# Altium PCB Mobo.PcbDoc (part 2 of 3)
Units mm, origin at the board's own origin, x right, y up, seen from the top; angles counter-clockwise.
Board outline 192.03 x 94.33 mm, 5 copper layers (Top Layer, POWER, InternalPlane2, GND, Bottom Layer); 327 components, 282 nets, 956 pads, 380 vias.
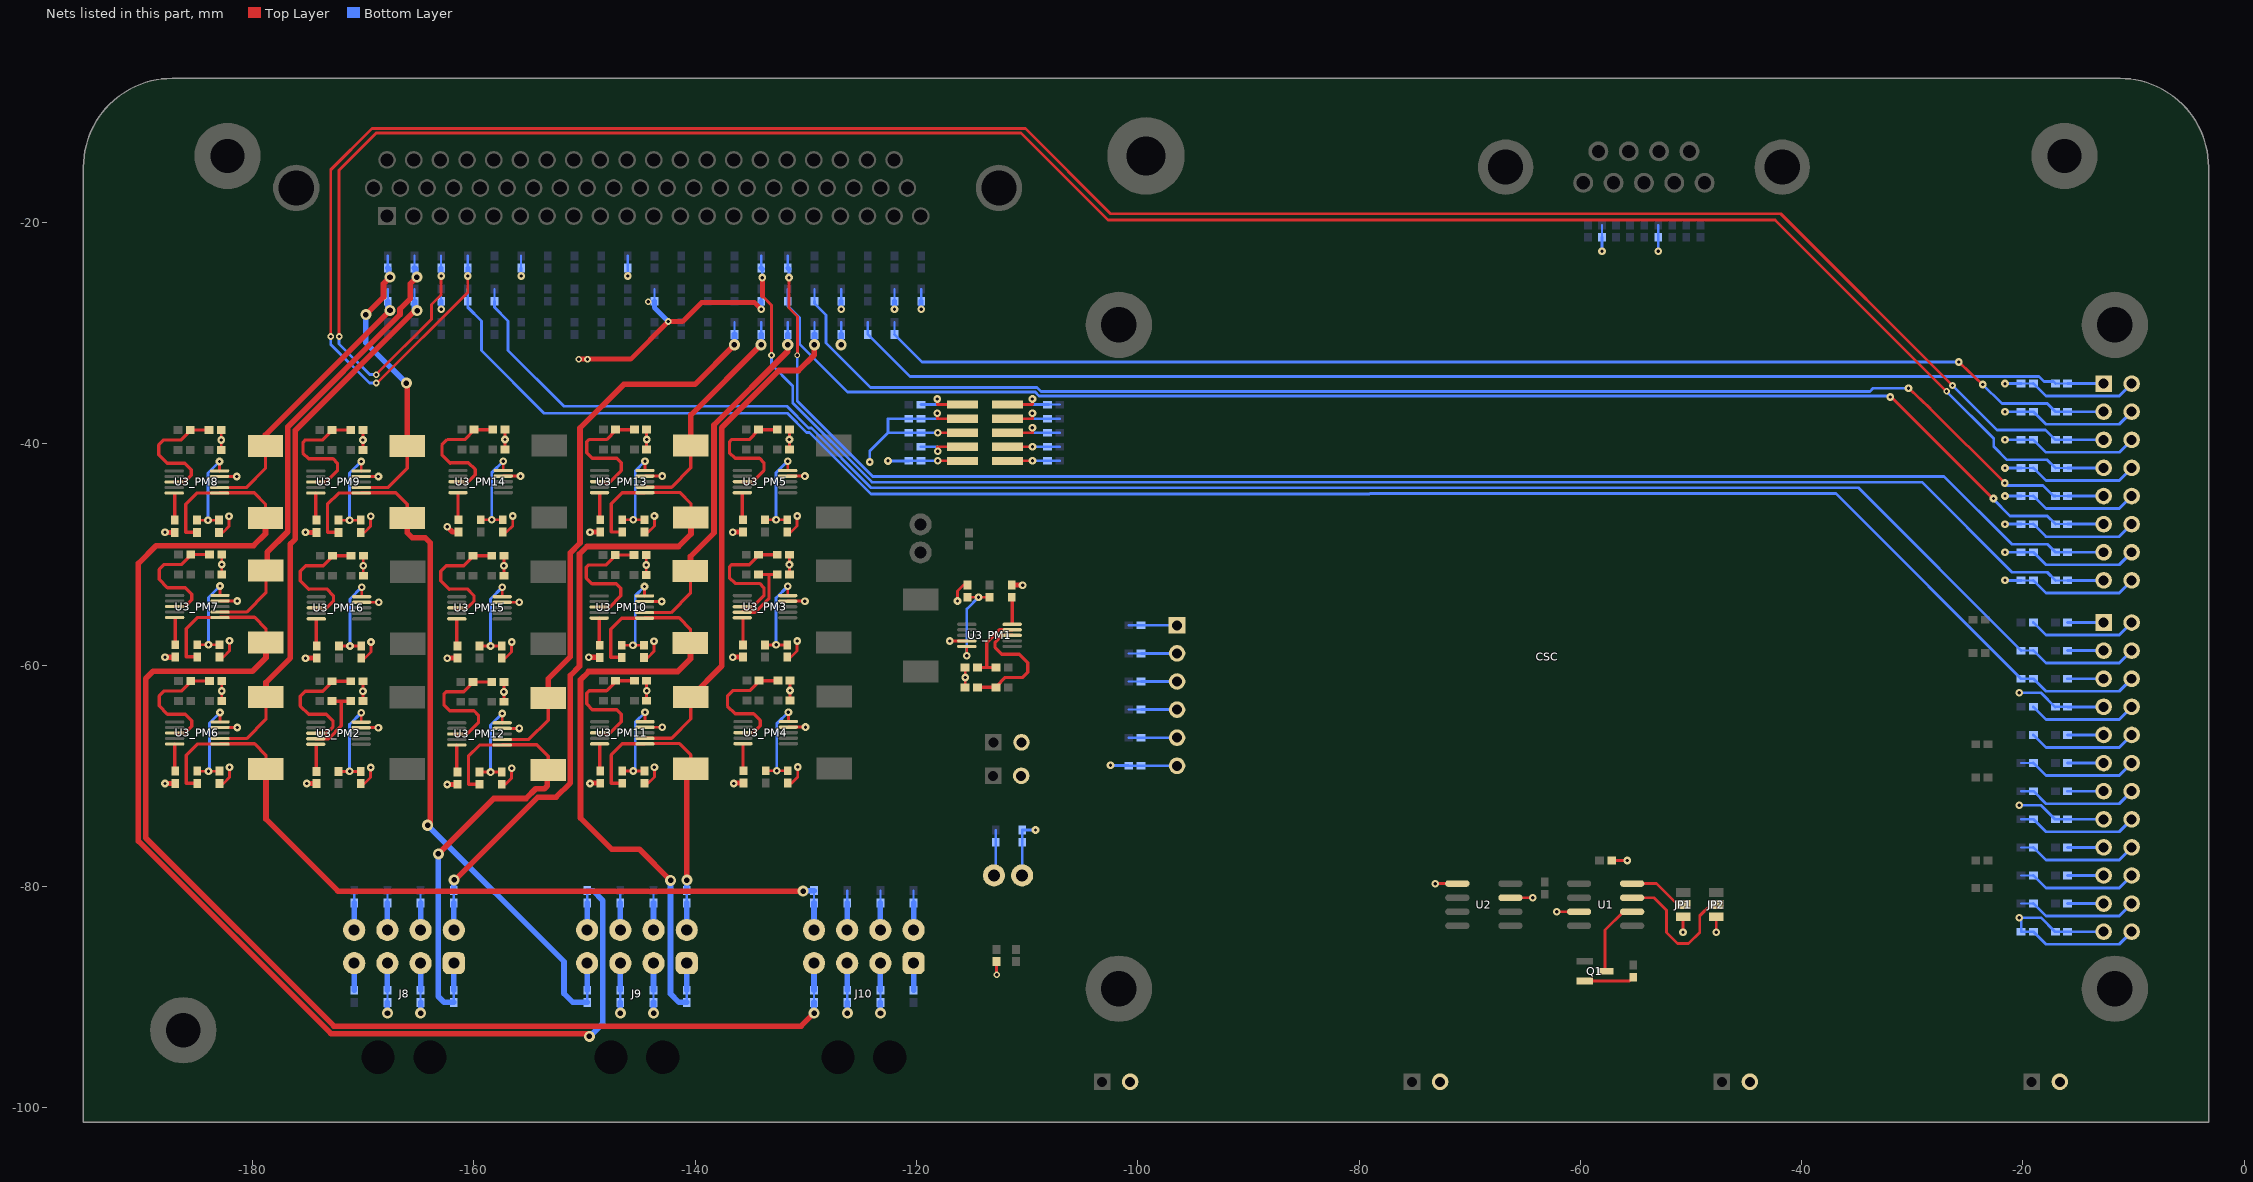
[diagram p5: the nets of this part, all layers, seen from the top]

## Via types
v1: diameter 0.7, hole 0.3, Top Layer to Bottom Layer, tented both sides, 256 vias
v2: diameter 1, hole 0.5, Top Layer to Bottom Layer, tented both sides, 61 vias
v3: diameter 0.6, hole 0.3, Top Layer to Bottom Layer, tented both sides, 37 vias
v4: diameter 0.6, hole 0.3, Top Layer to Bottom Layer, tented bottom, 20 vias
v5: diameter 0.7, hole 0.3, Top Layer to Bottom Layer, tented top, 5 vias
v6: diameter 0.5, hole 0.3, Top Layer to Bottom Layer, tented both sides, 1 vias

## Nets (pads, with @x,y where several pads share a name; then routed paths per layer and width w, separated by ;. In a path a pad name is that pad's centre, name@x,y a point inside that pad or via, vN(x,y) a via of type N, cw(c..) or ccw(c..) an arc to the next point about the centre after c; other vN are vias at no path point) (continued)
9V1_RX1: R13_PM6.1 U3_PM6.2 Z69.2 | length 48.5
  Top Layer w0.3: U3_PM6.2@-182.925,-66.644 -180.525,-66.644 -178.775,-64.894 R13_PM6.1@-178.775,-62.894
  Top Layer w0.508: R13_PM6.1@-178.775,-62.894 -178.775,-61.57 -176.566,-59.361 -176.566,-49.062 -176.116,-48.612 -176.116,-38.791 -165.298,-27.973 v2(-165.124,-27.973)
  Bottom Layer w0.508: Z69.2@-165.355,-27.125 -165.355,-27.7 -165.124,-27.931 v2(-165.124,-27.973)
9V1_RX1_IN: R10_PM6.1 R13_PM6.2 U3_PM6.1 Z95.1 | length 69.6
  Top Layer w0.3: R10_PM6.1@-184.975,-70.694 -185.975,-70.694 -185.975,-68.144 -184.975,-67.144 U3_PM6.1@-182.925,-67.144 ; U3_PM6.1@-182.925,-67.115 -179.804,-67.115 -178.775,-68.144 R13_PM6.2@-178.775,-69.394
  Top Layer w0.508: R13_PM6.2@-178.775,-69.394 -178.775,-73.927 -172.266,-80.436 v2(-130.241,-80.436)
  Bottom Layer w0.508: v2(-130.241,-80.436) -130.196,-80.391 Z95.1@-129.25,-80.391
9V1_RX2: R13_PM7.1 U3_PM7.2 Z68.2 | length 39.9
  Top Layer w0.3: U3_PM7.2@-182.925,-55.214 -180.525,-55.214 -178.775,-53.464 R13_PM7.1@-178.775,-51.711
  Top Layer w0.508: R13_PM7.1@-178.775,-51.711 -178.666,-51.602 -178.666,-49.811 -176.81,-47.955 -176.81,-38.48 -166.66,-28.331 -166.66,-27.83 -165.747,-26.917 -165.747,-25.56 v2(-165.142,-24.955)
  Bottom Layer w0.508: Z68.2@-165.355,-24.125 -165.264,-24.217 -165.264,-24.833 v2(-165.142,-24.955)
9V1_RX2_IN: R10_PM7.1 R13_PM7.2 U3_PM7.1 Z94.1 | length 109.2
  Top Layer w0.3: R10_PM7.1@-184.975,-59.264 -185.975,-59.264 -185.975,-56.714 -184.975,-55.714 U3_PM7.1@-182.925,-55.714 ; U3_PM7.1@-182.925,-55.685 -179.804,-55.685 -178.775,-56.714 R13_PM7.2@-178.775,-57.964
  Top Layer w0.508: R13_PM7.2@-178.775,-57.964 -178.775,-59.345 -179.991,-60.561 -188.966,-60.561 -189.641,-61.236 -189.641,-75.636 -172.641,-92.636 -130.416,-92.636 v2(-129.241,-91.461)
  Bottom Layer w0.508: Z94.1@-129.25,-90.491 -129.25,-91.452 v2(-129.241,-91.461)
9V1_TX1: R13_PM10.1 U3_PM10.2 Z5.1 | length 32.8
  Top Layer w0.3: U3_PM10.2@-144.566,-55.261 -142.166,-55.261 -140.416,-53.511 R13_PM10.1@-140.416,-51.511
  Top Layer w0.508: R13_PM10.1@-140.416,-51.511 -140.416,-50.186 -138.291,-48.061 -138.291,-38.311 -131.626,-31.646 v2(-131.626,-31.061)
  Bottom Layer w0.508: v2@-131.615,-31.05 v2(-131.626,-31.061) v2@-131.615,-31.05 ; v2@-131.615,-31.05 Z5.1@-131.615,-30.125 v2@-131.615,-31.05
9V1_TX1_IN: R10_PM10.1 R13_PM10.2 U3_PM10.1 Z80.1 | length 60
  Top Layer w0.3: R10_PM10.1@-146.616,-59.311 -147.616,-59.311 -147.616,-56.761 -146.616,-55.761 U3_PM10.1@-144.566,-55.761 ; U3_PM10.1@-144.566,-55.732 -141.445,-55.732 -140.416,-56.761 R13_PM10.2@-140.416,-58.011
  Top Layer w0.508: v2(-142.216,-79.461) -145.041,-76.636 -147.541,-76.636 -150.348,-73.83 -150.348,-61.332 -149.641,-60.625 -149.641,-60.586 -141.566,-60.586 -140.416,-59.436 R13_PM10.2@-140.416,-58.011
  Bottom Layer w0.508: v2(-142.216,-79.461) -142.216,-89.706 -142.219,-89.708 -141.436,-90.491 Z80.1@-140.75,-90.491
9V1_TX2: R13_PM11.1 U3_PM11.2 Z4.1 | length 45.3
  Top Layer w0.3: U3_PM11.2@-144.525,-66.629 -142.125,-66.629 -140.375,-64.879 R13_PM11.1@-140.375,-62.879
  Top Layer w0.508: R13_PM11.1@-140.375,-62.879 -137.591,-60.095 -137.591,-38.545 -132.437,-33.39 -130.646,-33.39 -129.216,-31.961 v2(-129.216,-31.061)
  Bottom Layer w0.508: v2(-129.216,-31.061) -129.205,-31.05 Z4.1@-129.205,-30.125
9V1_TX2_IN: R10_PM11.1 R13_PM11.2 U3_PM11.1 Z81.1 | length 24
  Top Layer w0.3: R10_PM11.1@-146.575,-70.679 -147.575,-70.679 -147.575,-68.129 -146.575,-67.129 U3_PM11.1@-144.525,-67.129 ; U3_PM11.1@-144.525,-67.1 -141.404,-67.1 -140.375,-68.129 R13_PM11.2@-140.375,-69.379
  Top Layer w0.508: v2(-140.741,-79.436) -140.741,-69.745 R13_PM11.2@-140.375,-69.379
  Bottom Layer w0.508: Z81.1@-140.75,-80.391 -140.75,-79.445 v2(-140.741,-79.436)
13V6_RX1: R13_PM8.1 U3_PM8.2 Z71.2 | length 24.7
  Top Layer w0.254: R13_PM8.1@-178.816,-40.211 -178.816,-39.205
  Top Layer w0.3: U3_PM8.2@-182.966,-43.961 -180.566,-43.961 -178.816,-42.211 R13_PM8.1@-178.816,-40.211
  Top Layer w0.508: -178.816,-39.205 v2(-167.567,-27.955)
  Bottom Layer w0.508: Z71.2@-167.765,-27.125 -167.765,-27.757 v2(-167.567,-27.955)
13V6_RX1_IN: R10_PM8.1 R13_PM8.2 U3_PM8.1 Z87.1 | length 114.6
  Top Layer w0.3: R10_PM8.1@-185.016,-48.011 -186.016,-48.011 -186.016,-45.461 -185.016,-44.461 U3_PM8.1@-182.966,-44.461 ; U3_PM8.1@-182.966,-44.432 -179.845,-44.432 -178.816,-45.461 R13_PM8.2@-178.816,-46.711
  Top Layer w0.508: R13_PM8.2@-178.816,-46.711 -178.816,-48.136 -179.891,-49.211 -188.691,-49.211 -190.302,-50.821 -190.302,-75.91 -172.903,-93.308 -149.794,-93.308 v2(-149.541,-93.561)
  Bottom Layer w0.508: Z87.1@-149.75,-80.391 -149.236,-80.391 -148.344,-81.284 -148.344,-92.388 -149.516,-93.561 v2(-149.541,-93.561)
13V6_RX2: R13_PM9.1 U3_PM9.2 Z70.2 | length 25.5
  Top Layer w0.3: U3_PM9.2@-170.166,-43.961 -167.766,-43.961 -166.016,-42.211 R13_PM9.1@-166.016,-40.211
  Top Layer w0.508: v2(-169.741,-28.336) -168.157,-26.752 -168.157,-25.545 v2(-167.567,-24.955) ; v2(-166.091,-34.536) -166.016,-34.611 R13_PM9.1@-166.016,-40.211
  Bottom Layer w0.508: v2(-169.741,-28.336) -169.741,-30.886 v2(-166.091,-34.536) ; Z70.2@-167.765,-24.125 -167.674,-24.217 -167.674,-24.848 v2(-167.567,-24.955)
13V6_RX2_IN: R10_PM9.1 R13_PM9.2 U3_PM9.1 Z86.1 | length 65
  Top Layer w0.3: R10_PM9.1@-172.216,-48.011 -173.216,-48.011 -173.216,-45.461 -172.216,-44.461 U3_PM9.1@-170.166,-44.461 ; U3_PM9.1@-170.166,-44.432 -167.045,-44.432 -166.016,-45.461 R13_PM9.2@-166.016,-46.711
  Top Layer w0.508: R13_PM9.2@-166.016,-46.711 -166.016,-48.036 -165.566,-48.486 -164.391,-48.486 -163.941,-48.936 -163.941,-74.257 v2(-164.167,-74.482)
  Bottom Layer w0.508: v2(-164.167,-74.482) -151.841,-86.808 -151.841,-89.686 -151.036,-90.491 Z86.1@-149.75,-90.491
13V6_TX1: R13_PM12.1 U3_PM12.2 Z7.1 | length 50.5
  Top Layer w0.3: U3_PM12.2@-157.425,-66.729 -155.025,-66.729 -153.275,-64.979 R13_PM12.1@-153.275,-62.979
  Top Layer w0.508: R13_PM12.1@-153.275,-62.979 -153.275,-61.254 -151.269,-59.247 -151.269,-49.855 -150.391,-48.977 -150.391,-38.586 -146.441,-34.636 -140.021,-34.636 v2(-136.446,-31.061)
  Bottom Layer w0.508: v2(-136.446,-31.061) -136.435,-31.05 Z7.1@-136.435,-30.125
13V6_TX1_IN: R10_PM12.1 R13_PM12.2 U3_PM12.1 Z72.1 | length 41.2
  Top Layer w0.3: R10_PM12.1@-159.475,-70.779 -160.475,-70.779 -160.475,-68.229 -159.475,-67.229 U3_PM12.1@-157.425,-67.229 ; U3_PM12.1@-157.425,-67.2 -154.304,-67.2 -153.275,-68.229 R13_PM12.2@-153.275,-69.479
  Top Layer w0.508: v2(-163.191,-77.061) -158.191,-72.061 -155.266,-72.061 -154.391,-71.186 -153.616,-71.186 -153.341,-70.911 -153.341,-69.545 R13_PM12.2@-153.275,-69.479
  Bottom Layer w0.508: v2(-163.191,-77.061) -163.216,-77.086 -163.216,-77.411 -163.206,-77.421 -163.206,-89.946 -162.661,-90.491 Z72.1@-161.8,-90.491
13V6_TX2: R13_PM13.1 U3_PM13.2 Z6.1 | length 19.6
  Top Layer w0.3: U3_PM13.2@-144.525,-43.929 -142.125,-43.929 -140.375,-42.179 R13_PM13.1@-140.375,-40.179
  Top Layer w0.508: R13_PM13.1@-140.375,-40.179 -140.375,-37.4 v2(-134.036,-31.061)
  Bottom Layer w0.508: v2(-134.036,-31.061) -134.025,-31.05 Z6.1@-134.025,-30.125
13V6_TX2_IN: R10_PM13.1 R13_PM13.2 U3_PM13.1 Z73.1 | length 61.3
  Top Layer w0.3: R10_PM13.1@-146.575,-47.979 -147.575,-47.979 -147.575,-45.429 -146.575,-44.429 U3_PM13.1@-144.525,-44.429 ; U3_PM13.1@-144.516,-44.409 -141.395,-44.409 -140.366,-45.438 R13_PM13.2@-140.366,-46.688
  Top Layer w0.508: v2(-161.766,-79.411) -161.682,-79.411 -154.207,-71.936 -152.557,-71.936 -151.269,-70.647 -151.269,-60.939 -150.441,-60.111 -150.441,-49.961 -149.766,-49.286 -141.491,-49.286 -140.366,-48.161 -140.366,-46.688 R13_PM13.2@-140.375,-46.679
  Bottom Layer w0.508: Z73.1@-161.8,-80.391 -161.8,-79.445 v2(-161.766,-79.411)
AF_RX1: Z64.2 Z110.1 | length 204.2
  Top Layer w0.254: v3(-172.919,-30.311) -172.919,-15.248 -169.195,-11.525 -110.152,-11.525 -102.45,-19.227 -41.89,-19.227 v3(-26.374,-34.743) ; v3(-168.816,-34.513) -168.724,-34.513 -160.535,-26.324 v1(-160.535,-24.844)
  Bottom Layer w0.254: v3(-172.919,-30.311) -172.919,-31.024 -169.429,-34.513 v3(-168.816,-34.513) ; v3(-26.374,-34.743) -22.346,-38.771 -17.956,-38.771 Z110.1@-17.076,-39.651
  Bottom Layer w0.457: v1(-160.535,-24.844) Z64.2@-160.535,-24.125
AF_RX2: Z66.2 Z111.1 | length 201.7
  Top Layer w0.254: v3(-172.166,-30.311) -172.166,-15.286 -168.811,-11.931 -110.536,-11.931 -102.681,-19.786 -42.395,-19.786 v3(-26.906,-35.276) ; v3(-168.816,-33.761) -163.816,-28.761 -163.816,-27.436 -162.945,-26.565 v1(-162.945,-24.844)
  Bottom Layer w0.254: v3(-172.166,-30.311) -172.166,-30.986 -169.391,-33.761 v3(-168.816,-33.761) ; v3(-26.906,-35.276) -22.641,-39.54 -22.641,-40.258 -21.439,-41.46 -17.807,-41.46 Z111.1@-17.076,-42.191
  Bottom Layer w0.457: v1(-162.945,-24.844) Z66.2@-162.945,-24.125
AF_TX1: Z2.1 Z108.1 | length 109.2
  Bottom Layer w0.254: Z2.1@-124.385,-30.125 -120.569,-33.942 -18.55,-33.942 -18.099,-34.393 -17.254,-34.393 Z108.1@-17.076,-34.571
AF_TX2: Z1.1 Z109.1 | length 107.8
  Top Layer w0.254: v1(-25.803,-32.615) v1(-23.644,-34.647)
  Bottom Layer w0.254: Z1.1@-121.975,-30.125 -119.485,-32.615 -118.542,-32.615 v1(-25.803,-32.615) ; v1(-23.644,-34.647) -21.911,-36.38 -17.807,-36.38 Z109.1@-17.076,-37.111
COS_RX1: Z63.2 Z144.2 | length 152.9
  Bottom Layer w0.254: Z63.2@-158.125,-27.125 -158.125,-27.67 -156.891,-28.904 -156.891,-31.586 -151.866,-36.611 -131.716,-36.611 -129.757,-38.57 -129.492,-38.57 -124.085,-43.977 -79.016,-43.977 ; -79.016,-43.987 -34.88,-43.987 Z144.2@-20.166,-58.701
COS_RX2: Z65.2 Z145.2 | length 156.4
  Bottom Layer w0.254: Z65.2@-160.535,-27.125 -160.535,-27.67 -159.301,-28.904 -159.301,-31.586 -153.641,-37.246 -131.655,-37.246 -129.925,-38.976 -129.661,-38.976 -124.101,-44.536 -79.057,-44.536 -79.016,-44.495 -36.912,-44.495 Z145.2@-20.166,-61.241
GMSK_RX1: Z40.2 Z114.1 | length 131.8
  Top Layer w0.254: v1@-131.523,-25.003 -131.523,-27.729 -130.741,-28.511 -130.741,-31.986 v6(-130.766,-32.011)
  Top Layer w0.457: v1@-131.531,-24.994 -131.523,-25.003 v1(-131.514,-24.994)
  Bottom Layer w0.254: v1(-131.514,-24.994) Z40.2@-131.514,-24.226 ; v6(-130.766,-32.011) -130.766,-36.147 -123.942,-42.971 -27.128,-42.971 -21.019,-49.08 -17.807,-49.08 Z114.1@-17.076,-49.811
  Bottom Layer w0.457: Z40.2@-131.615,-24.125 Z40.2@-131.514,-24.226
GMSK_RX2: Z42.2 Z115.1 | length 134.1
  Top Layer w0.254: -133.916,-26.661 -133.091,-27.486 v3(-133.091,-32.011)
  Top Layer w0.457: v1@-133.941,-24.994 v1@-133.933,-25.003 ; -133.916,-26.661 v1@-133.916,-25.019
  Bottom Layer w0.254: v1(-133.924,-24.994) Z42.2@-133.924,-24.226 ; v3(-133.091,-32.011) -133.091,-32.861 -131.173,-34.78 -131.173,-36.315 -124.009,-43.479 -29.12,-43.479 -20.979,-51.62 -17.807,-51.62 Z115.1@-17.076,-52.351
  Bottom Layer w0.457: Z42.2@-134.025,-24.125 Z42.2@-133.924,-24.226
GMSK_TX1: Z39.2 Z112.1 | length 121.2
  Top Layer w0.254: v1@-30.334,-34.979 -28.393,-36.806 v1(-21.638,-43.561)
  Bottom Layer w0.254: Z39.2@-129.205,-27.125 -129.205,-27.333 -128.166,-28.372 -128.166,-30.911 -124.152,-34.925 -109.087,-34.925 -108.736,-35.276 -33.832,-35.276 -33.541,-34.986 v1(-30.34,-34.986) ; v1(-21.638,-43.561) -21.428,-43.771 -18.205,-43.771 -17.245,-44.731 Z112.1@-17.076,-44.731
GMSK_TX2: Z41.2 Z113.1 | length 124.7
  Top Layer w0.254: v1@-31.952,-35.747 -22.738,-44.961 v1(-22.666,-44.961)
  Bottom Layer w0.254: Z41.2@-131.615,-27.125 -131.615,-27.562 -130.566,-28.611 -130.566,-30.986 -126.221,-35.332 -109.255,-35.332 -108.904,-35.683 -32.119,-35.683 -32.016,-35.786 v1(-31.991,-35.786) ; v1(-22.666,-44.961) -22.738,-44.961 -21.159,-46.54 -17.807,-46.54 Z113.1@-17.076,-47.271
GND: C1.1 J2.2 J3.2 J4.2 J5.2 J6.2 J7.2 JP1.3 JP2.3 R11_PM1.2 R11_PM2.2 R11_PM3.2 R11_PM4.2 R11_PM5.2 R11_PM6.2 R11_PM7.2 R11_PM8.2 R11_PM9.2 R11_PM10.2 R11_PM11.2 R11_PM12.2 R11_PM13.2 R11_PM14.2 R11_PM15.2 R11_PM16.2 R12_PM1.2 R12_PM2.2 R12_PM3.2 R12_PM4.2 R12_PM5.2 R12_PM6.2 R12_PM7.2 R12_PM8.2 R12_PM9.2 R12_PM10.2 R12_PM11.2 R12_PM12.2 R12_PM13.2 R12_PM14.2 R12_PM15.2 R12_PM16.2 R15_PM1.2 R15_PM2.2 R15_PM3.2 R15_PM4.2 R15_PM5.2 R15_PM6.2 R15_PM7.2 R15_PM8.2 R15_PM9.2 R15_PM10.2 R15_PM11.2 R15_PM12.2 R15_PM13.2 R15_PM14.2 R15_PM15.2 R15_PM16.2 R17_PM1.2 R17_PM2.2 R17_PM3.2 R17_PM4.2 R17_PM5.2 R17_PM6.2 R17_PM7.2 R17_PM8.2 R17_PM9.2 R17_PM10.2 R17_PM11.2 R17_PM12.2 R17_PM13.2 R17_PM14.2 R17_PM15.2 R17_PM16.2 R19.2 U1.3 U2.3 U2.5 U3_PM1.4 U3_PM2.4 U3_PM3.4 U3_PM4.4 U3_PM5.4 U3_PM6.4 U3_PM7.4 U3_PM8.4 U3_PM9.4 U3_PM10.4 U3_PM11.4 U3_PM12.4 U3_PM13.4 U3_PM14.4 U3_PM15.4 U3_PM16.4 Z3.1 Z24.2 Z28.2 Z31.2 Z33.2 Z37.2 Z43.2 Z51.2 Z52.2 Z60.2 Z67.2 Z74.1 Z76.1 Z82.1 Z84.1 Z90.1 Z92.1 Z99.1 Z100.1 Z101.1 Z107.1 Z120.1 Z121.1 Z122.1 Z123.1 Z125.1 Z126.2 Z127.2 Z128.2 Z129.2 Z130.2 Z131.2 Z132.2 Z133.2 | length 186.2
  Top Layer w0.254: R11_PM8.2@-183.016,-48.011 -182.666,-48.011 -182.116,-47.461 v1(-182.116,-46.561) ; R11_PM6.2@-182.975,-70.694 -182.625,-70.694 -182.075,-70.144 v1(-182.075,-69.244) ; R11_PM7.2@-182.975,-59.264 -182.625,-59.264 -182.075,-58.714 v1(-182.075,-57.814) ; U3_PM8.4@-182.966,-42.961 v1(-181.416,-42.961) ; U3_PM6.4@-182.925,-65.644 v1(-181.375,-65.644) ; U3_PM7.4@-182.925,-54.214 v1(-181.375,-54.214) ; R17_PM8.2@-182.816,-40.561 R15_PM8.2@-182.816,-38.761 ; R17_PM6.2@-182.775,-63.244 R15_PM6.2@-182.775,-61.444 ; R17_PM7.2@-182.775,-51.814 R15_PM7.2@-182.775,-50.014 ; R11_PM2.2@-170.216,-70.711 -169.866,-70.711 -169.316,-70.161 v1(-169.316,-69.261) ; R11_PM9.2@-170.216,-48.011 -169.866,-48.011 -169.316,-47.461 v1(-169.316,-46.561) ; R11_PM16.2@-170.175,-59.379 -169.825,-59.379 -169.275,-58.829 v1(-169.275,-57.929) ; U3_PM2.4@-170.166,-65.661 v1(-168.616,-65.661) ; U3_PM9.4@-170.166,-42.961 v1(-168.616,-42.961) ; U3_PM16.4@-170.125,-54.329 v1(-168.575,-54.329) ; R17_PM2.2@-170.016,-63.261 R15_PM2.2@-170.016,-61.461 ; R17_PM9.2@-170.016,-40.561 R15_PM9.2@-170.016,-38.761 ; R17_PM16.2@-169.975,-51.929 R15_PM16.2@-169.975,-50.129 ; R11_PM12.2@-157.475,-70.779 -157.125,-70.779 -156.575,-70.229 v1(-156.575,-69.329) ; R11_PM15.2@-157.475,-59.379 -157.125,-59.379 -156.575,-58.829 v1(-156.575,-57.929) ; U3_PM12.4@-157.425,-65.729 v1(-155.875,-65.729) ; U3_PM15.4@-157.425,-54.329 v1(-155.875,-54.329) ; R11_PM14.2@-157.375,-47.979 -157.025,-47.979 -156.475,-47.429 v1(-156.475,-46.529) ; U3_PM14.4@-157.325,-42.929 v1(-155.775,-42.929) ; R17_PM12.2@-157.275,-63.329 R15_PM12.2@-157.275,-61.529 ; R17_PM15.2@-157.275,-51.929 R15_PM15.2@-157.275,-50.129 ; R17_PM14.2@-157.175,-40.529 R15_PM14.2@-157.175,-38.729 ; R11_PM10.2@-144.616,-59.311 -144.266,-59.311 -143.716,-58.761 v1(-143.716,-57.861) ; R11_PM11.2@-144.575,-70.679 -144.225,-70.679 -143.675,-70.129 v1(-143.675,-69.229) ; R11_PM13.2@-144.575,-47.979 -144.225,-47.979 -143.675,-47.429 v1(-143.675,-46.529) ; U3_PM10.4@-144.566,-54.261 v1(-143.016,-54.261) ; U3_PM11.4@-144.525,-65.629 v1(-142.975,-65.629) ; U3_PM13.4@-144.525,-42.929 v1(-142.975,-42.929) ; R17_PM10.2@-144.416,-51.861 R15_PM10.2@-144.416,-50.061 ; R17_PM11.2@-144.375,-63.229 R15_PM11.2@-144.375,-61.429 ; R17_PM13.2@-144.375,-40.529 R15_PM13.2@-144.375,-38.729 ; R11_PM3.2@-131.675,-59.279 -131.325,-59.279 -130.775,-58.729 v1(-130.775,-57.829) ; R11_PM5.2@-131.675,-47.979 -131.325,-47.979 -130.775,-47.429 v1(-130.775,-46.529) ; U3_PM3.4@-131.625,-54.229 v1(-130.075,-54.229) ; U3_PM5.4@-131.625,-42.929 v1(-130.075,-42.929) ; R11_PM4.2@-131.616,-70.661 -131.266,-70.661 -130.716,-70.111 v1(-130.716,-69.211) ; U3_PM4.4@-131.566,-65.611 v1(-130.016,-65.611) ; R17_PM3.2@-131.475,-51.829 R15_PM3.2@-131.475,-50.029 ; R17_PM5.2@-131.475,-40.529 R15_PM5.2@-131.475,-38.729 ; R17_PM4.2@-131.416,-63.211 R15_PM4.2@-131.416,-61.411 ; v1(-116.991,-57.824) U3_PM1.4@-115.441,-57.824 ; v1(-116.291,-54.224) -116.291,-53.324 -115.741,-52.774 R11_PM1.2@-115.391,-52.774 ; R15_PM1.2@-115.591,-62.024 R17_PM1.2@-115.591,-60.224 ; v4(-112.75,-88) R19.2@-112.75,-86.8 ; v1(-73.121,-79.756) U2.5@-71.116,-79.756 ; U2.3@-66.316,-81.026 v1(-64.311,-81.026) ; v1(-62.121,-82.296) U1.3@-60.116,-82.296 ; C1.1@-57.166,-77.661 v1(-55.757,-77.661) ; v1(-50.716,-84.161) JP1.3@-50.716,-82.752 ; v1(-47.716,-84.161) JP2.3@-47.716,-82.752
  Top Layer w0.457: v1(-187.9,-59.3) R12_PM7.2@-187.011,-59.3 ; v1@-187.894,-70.694 R12_PM6.2@-186.975,-70.694 ; v1@-187.889,-48.011 R12_PM8.2@-187.016,-48.011 ; v1(-175.2,-59.4) -175.179,-59.379 R12_PM16.2@-174.175,-59.379 ; v1@-175.189,-48.011 R12_PM9.2@-174.216,-48.011 ; v1@-175.089,-70.711 R12_PM2.2@-174.216,-70.711 ; v1(-162.4,-47.5) -161.921,-47.979 R12_PM14.2@-161.375,-47.979 ; v1@-162.379,-70.779 R12_PM12.2@-161.475,-70.779 ; v1@-162.379,-59.379 R12_PM15.2@-161.475,-59.379 ; v3(-150.516,-32.361) -145.816,-32.361 v3(-142.416,-28.961) -141.116,-28.961 -139.416,-27.261 -134.608,-27.261 v1(-134.025,-27.844) ; v1(-149.6,-59.3) -148.627,-59.3 R12_PM10.2@-148.616,-59.311 ; v1@-149.479,-70.679 R12_PM11.2@-148.575,-70.679 ; v1@-149.479,-47.979 R12_PM13.2@-148.575,-47.979 ; v1@-136.579,-59.279 R12_PM3.2@-135.675,-59.279 ; v1@-136.579,-47.979 R12_PM5.2@-135.675,-47.979 ; v1@-136.461,-70.661 R12_PM4.2@-135.616,-70.661 ; v2(-126.806,-31.061) v2@-126.795,-31.05 ; R12_PM1.2@-111.391,-52.774 v1@-110.426,-52.774
  Bottom Layer w0.254: v1(-155.715,-24.844) Z60.2@-155.715,-24.125 ; v1(-146.075,-24.844) Z52.2@-146.075,-24.125 ; v4(-144.216,-27.161) -144.18,-27.125 Z51.2@-143.665,-27.125 ; v1(-124.216,-41.661) -124.216,-40.661 -122.571,-39.016 ; v1(-122.571,-41.556) Z101.1@-120.693,-41.556 ; Z100.1@-120.693,-39.016 -122.571,-39.016 ; Z99.1@-120.693,-37.746 -122.571,-37.746 -122.571,-39.016 ; Z125.1@-110.428,-74.921 -110.418,-74.911 v1(-109.241,-74.911) ; v1(-102.464,-69.07) -100.847,-69.07 Z107.1@-100.806,-69.111 ; v1(-58.043,-22.622) Z28.2@-58.043,-21.352 ; v1(-52.963,-22.622) Z24.2@-52.963,-21.352 ; v1@-21.728,-34.671 v1(-21.628,-34.571) Z126.2@-20.166,-34.571 ; v1(-21.628,-52.351) Z133.2@-20.166,-52.351 ; v1(-21.628,-49.811) Z132.2@-20.166,-49.811 ; v1(-21.628,-47.271) Z131.2@-20.166,-47.271 ; v1(-21.628,-44.731) Z130.2@-20.166,-44.731 ; v1(-21.628,-42.191) Z129.2@-20.166,-42.191 ; v1(-21.628,-39.651) Z128.2@-20.166,-39.651 ; v1(-21.628,-37.111) Z127.2@-20.166,-37.111 ; v1(-20.336,-72.671) -18.371,-72.671 Z121.1@-17.101,-73.941 ; v1(-20.336,-62.511) -18.371,-62.511 -17.101,-63.781 Z120.1@-17.076,-63.781 ; Z123.1@-20.166,-84.101 -20.166,-83.001 v1(-20.336,-82.831) -18.371,-82.831 Z122.1@-17.101,-84.101
  Bottom Layer w0.45: Z51.2@-143.665,-27.125 -143.665,-27.712 v3(-142.416,-28.961)
  Bottom Layer w0.457: v1(-162.945,-27.844) Z67.2@-162.945,-27.125 ; v1(-134.025,-27.844) Z43.2@-134.025,-27.125 ; v1(-126.795,-27.844) Z37.2@-126.795,-27.125 ; v1(-121.975,-27.844) Z33.2@-121.975,-27.125 ; v1(-119.565,-27.844) Z31.2@-119.565,-27.125
  Bottom Layer w0.508: Z76.1@-167.8,-90.491 -167.8,-91.452 v2(-167.791,-91.461) ; Z74.1@-164.8,-90.491 -164.8,-91.452 v2(-164.791,-91.461) ; Z84.1@-146.75,-90.491 -146.75,-91.452 v2(-146.741,-91.461) ; Z82.1@-143.75,-90.491 -143.75,-91.452 v2(-143.741,-91.461) ; v2(-126.806,-31.061) -126.795,-31.05 Z3.1@-126.795,-30.125 ; Z92.1@-126.25,-90.491 -126.25,-91.452 v2(-126.241,-91.461) ; Z90.1@-123.25,-90.491 -123.25,-91.452 v2(-123.241,-91.461)
  other v1: -162.4,-70.8 -187.9,-70.7 -175.1,-70.7 -149.5,-70.7 -136.5,-70.7 -157.275,-62.429 -170.016,-62.361 -182.775,-62.344 -144.375,-62.329 -131.416,-62.311 -115.591,-61.124 -162.4,-59.4 -136.6,-59.3 -110.4,-52.8 -169.975,-51.029 -157.275,-51.029 -144.416,-50.961 -131.475,-50.929 -182.775,-50.914 -187.9,-48 -175.2,-48 -149.5,-48 -136.6,-48 -182.816,-39.661 -170.016,-39.661 -157.175,-39.629 -144.375,-39.629 -131.475,-39.629
  other v3: -149.716,-32.361
NetCSC_A1: CSC.A1 Z96.2 | length 4.8
  Top Layer w0.254: v1(-118.116,-35.961) -118.116,-36.433 -118.078,-36.471 CSC.A1@-115.828,-36.471
  Bottom Layer w0.254: Z96.2@-119.588,-36.471 -118.078,-36.471 -118.116,-36.433 v1(-118.116,-35.961)
NetCSC_A2: CSC.A2 Z134.1 | length 4.8
  Top Layer w0.254: CSC.A2@-111.764,-36.471 -109.514,-36.471 -109.516,-36.469 v1(-109.516,-35.961)
  Bottom Layer w0.254: v1(-109.516,-35.961) -109.516,-36.469 -109.514,-36.471 Z134.1@-108.004,-36.471
NetCSC_A3: CSC.A3 Z99.2 | length 4.8
  Top Layer w0.254: v1(-118.116,-37.261) -118.078,-37.299 -118.078,-37.741 CSC.A3@-115.828,-37.741
  Bottom Layer w0.254: Z99.2@-119.588,-37.741 -118.078,-37.741 -118.078,-37.299 v1(-118.116,-37.261)
NetCSC_A4: CSC.A4 Z135.1 | length 4.7
  Top Layer w0.254: CSC.A4@-111.764,-37.741 -109.514,-37.741 v1(-109.516,-37.261) v1(-109.516,-37.261)
  Bottom Layer w0.254: v1(-109.516,-37.261) v1(-109.516,-37.261) -109.514,-37.741 Z135.1@-108.004,-37.741
NetCSC_A5: CSC.A5 Z100.2 | length 3.8
  Top Layer w0.254: v1(-118.078,-39.011) CSC.A5@-115.828,-39.011
  Bottom Layer w0.254: Z100.2@-119.588,-39.011 v1(-118.078,-39.011)
NetCSC_A6: CSC.A6 Z136.1 | length 4.7
  Top Layer w0.254: CSC.A6@-111.764,-39.011 -109.514,-39.011 v1(-109.516,-38.561) v1(-109.516,-38.561)
  Bottom Layer w0.254: v1(-109.516,-38.561) v1(-109.516,-38.561) -109.514,-39.011 Z136.1@-108.004,-39.011
NetCSC_A7: CSC.A7 Z97.2 | length 4.6
  Top Layer w0.254: v1(-118.078,-40.676) -118.078,-40.281 CSC.A7@-115.828,-40.281
  Bottom Layer w0.254: Z97.2@-119.588,-40.281 -118.078,-40.281 v1(-118.078,-40.676)
NetCSC_A8: CSC.A8 Z98.2 | length 3.8
  Top Layer w0.254: CSC.A8@-111.764,-40.281 v1(-109.514,-40.281)
  Bottom Layer w0.254: v1(-109.514,-40.281) Z98.2@-108.004,-40.281
NetCSC_A9: CSC.A9 Z101.2 | length 3.8
  Top Layer w0.254: v1(-118.078,-41.551) CSC.A9@-115.828,-41.551
  Bottom Layer w0.254: Z101.2@-119.588,-41.551 v1(-118.078,-41.551)
NetCSC_A10: CSC.A10 Z137.1 | length 3.8
  Top Layer w0.254: CSC.A10@-111.764,-41.551 v1(-109.514,-41.551)
  Bottom Layer w0.254: v1(-109.514,-41.551) Z137.1@-108.004,-41.551
NetCSC_B1: CSC.B1 Z102.2 | length 3.3
  Bottom Layer w0.254: Z102.2@-99.706,-56.411 CSC.B1@-96.446,-56.411
NetCSC_B2: CSC.B2 Z103.2 | length 3.3
  Bottom Layer w0.254: Z103.2@-99.706,-58.951 CSC.B2@-96.446,-58.951
NetCSC_B3: CSC.B3 Z104.2 | length 3.3
  Bottom Layer w0.254: Z104.2@-99.706,-61.491 CSC.B3@-96.446,-61.491
NetCSC_B4: CSC.B4 Z105.2 | length 3.3
  Bottom Layer w0.254: Z105.2@-99.706,-64.031 CSC.B4@-96.446,-64.031
NetCSC_B5: CSC.B5 Z106.2 | length 3.3
  Bottom Layer w0.254: Z106.2@-99.706,-66.571 CSC.B5@-96.446,-66.571
NetCSC_B6: CSC.B6 Z107.2 | length 3.3
  Bottom Layer w0.254: Z107.2@-99.706,-69.111 CSC.B6@-96.446,-69.111
NetCSC_C1: CSC.C1 Z108.2 | length 3.3
  Bottom Layer w0.254: Z108.2@-15.976,-34.571 CSC.C1@-12.716,-34.571
NetCSC_C2: CSC.C2 Z126.1 | length 9.8
  Bottom Layer w0.254: Z126.1@-19.066,-34.571 -17.935,-35.702 -11.307,-35.702 CSC.C2@-10.176,-34.571
NetCSC_C3: CSC.C3 Z109.2 | length 3.3
  Bottom Layer w0.254: Z109.2@-15.976,-37.111 CSC.C3@-12.716,-37.111
NetCSC_C4: CSC.C4 Z127.1 | length 9.8
  Bottom Layer w0.254: Z127.1@-19.066,-37.111 -17.935,-38.242 -11.307,-38.242 CSC.C4@-10.176,-37.111
NetCSC_C5: CSC.C5 Z110.2 | length 3.3
  Bottom Layer w0.254: Z110.2@-15.976,-39.651 CSC.C5@-12.716,-39.651
NetCSC_C6: CSC.C6 Z128.1 | length 9.8
  Bottom Layer w0.254: Z128.1@-19.066,-39.651 -17.935,-40.782 -11.307,-40.782 CSC.C6@-10.176,-39.651
NetCSC_C7: CSC.C7 Z111.2 | length 3.3
  Bottom Layer w0.254: Z111.2@-15.976,-42.191 CSC.C7@-12.716,-42.191
NetCSC_C8: CSC.C8 Z129.1 | length 9.8
  Bottom Layer w0.254: Z129.1@-19.066,-42.191 -17.935,-43.322 -11.307,-43.322 CSC.C8@-10.176,-42.191
NetCSC_C9: CSC.C9 Z112.2 | length 3.3
  Bottom Layer w0.254: Z112.2@-15.976,-44.731 CSC.C9@-12.716,-44.731
NetCSC_C10: CSC.C10 Z130.1 | length 9.8
  Bottom Layer w0.254: Z130.1@-19.066,-44.731 -17.935,-45.862 -11.307,-45.862 CSC.C10@-10.176,-44.731
NetCSC_C11: CSC.C11 Z113.2 | length 3.3
  Bottom Layer w0.254: Z113.2@-15.976,-47.271 CSC.C11@-12.716,-47.271
NetCSC_C12: CSC.C12 Z131.1 | length 9.8
  Bottom Layer w0.254: Z131.1@-19.066,-47.271 -17.935,-48.402 -11.307,-48.402 CSC.C12@-10.176,-47.271
NetCSC_C13: CSC.C13 Z114.2 | length 3.3
  Bottom Layer w0.254: Z114.2@-15.976,-49.811 CSC.C13@-12.716,-49.811
NetCSC_C14: CSC.C14 Z132.1 | length 9.8
  Bottom Layer w0.254: Z132.1@-19.066,-49.811 -17.935,-50.942 -11.307,-50.942 CSC.C14@-10.176,-49.811
NetCSC_C15: CSC.C15 Z115.2 | length 3.3
  Bottom Layer w0.254: Z115.2@-15.976,-52.351 CSC.C15@-12.716,-52.351
NetCSC_C16: CSC.C16 Z133.1 | length 9.8
  Bottom Layer w0.254: Z133.1@-19.066,-52.351 -17.935,-53.482 -11.307,-53.482 CSC.C16@-10.176,-52.351
NetCSC_D1: CSC.D1 Z116.2 | length 3.3
  Bottom Layer w0.254: Z116.2@-15.976,-56.161 CSC.D1@-12.716,-56.161
NetCSC_D2: CSC.D2 Z117.2 | length 9.8
  Bottom Layer w0.254: Z117.2@-19.066,-56.161 -17.935,-57.292 -11.307,-57.292 CSC.D2@-10.176,-56.161
NetCSC_D3: CSC.D3 Z142.1 | length 3.3
  Bottom Layer w0.254: Z142.1@-15.976,-58.701 CSC.D3@-12.716,-58.701
NetCSC_D4: CSC.D4 Z144.1 | length 9.8
  Bottom Layer w0.254: Z144.1@-19.066,-58.701 -17.935,-59.832 -11.307,-59.832 CSC.D4@-10.176,-58.701
NetCSC_D5: CSC.D5 Z143.1 | length 3.3
  Bottom Layer w0.254: Z143.1@-15.976,-61.241 CSC.D5@-12.716,-61.241
NetCSC_D6: CSC.D6 Z145.1 | length 9.8
  Bottom Layer w0.254: Z145.1@-19.066,-61.241 -17.935,-62.372 -11.307,-62.372 CSC.D6@-10.176,-61.241
NetCSC_D7: CSC.D7 Z120.2 | length 3.3
  Bottom Layer w0.254: Z120.2@-15.976,-63.781 CSC.D7@-12.716,-63.781
NetCSC_D8: CSC.D8 Z146.1 | length 9.8
  Bottom Layer w0.254: Z146.1@-19.066,-63.781 -17.935,-64.912 -11.307,-64.912 CSC.D8@-10.176,-63.781
NetCSC_D9: CSC.D9 Z118.2 | length 3.3
  Bottom Layer w0.254: Z118.2@-15.976,-66.321 CSC.D9@-12.716,-66.321
NetCSC_D10: CSC.D10 Z147.1 | length 9.8
  Bottom Layer w0.254: Z147.1@-19.066,-66.321 -17.935,-67.452 -11.307,-67.452 CSC.D10@-10.176,-66.321
NetCSC_D11: CSC.D11 Z140.1 | length 3.3
  Bottom Layer w0.254: Z140.1@-15.976,-68.861 CSC.D11@-12.716,-68.861
NetCSC_D12: CSC.D12 Z148.1 | length 9.8
  Bottom Layer w0.254: Z148.1@-19.066,-68.861 -17.935,-69.992 -11.307,-69.992 CSC.D12@-10.176,-68.861
NetCSC_D13: CSC.D13 Z141.1 | length 3.3
  Bottom Layer w0.254: Z141.1@-15.976,-71.401 CSC.D13@-12.716,-71.401
NetCSC_D14: CSC.D14 Z149.1 | length 9.8
  Bottom Layer w0.254: Z149.1@-19.066,-71.401 -17.935,-72.532 -11.307,-72.532 CSC.D14@-10.176,-71.401
NetCSC_D15: CSC.D15 Z121.2 | length 3.3
  Bottom Layer w0.254: Z121.2@-15.976,-73.941 CSC.D15@-12.716,-73.941
NetCSC_D16: CSC.D16 Z150.1 | length 9.8
  Bottom Layer w0.254: Z150.1@-19.066,-73.941 -17.935,-75.072 -11.307,-75.072 CSC.D16@-10.176,-73.941
NetCSC_D17: CSC.D17 Z119.2 | length 3.3
  Bottom Layer w0.254: Z119.2@-15.976,-76.481 CSC.D17@-12.716,-76.481
NetCSC_D18: CSC.D18 Z151.1 | length 9.8
  Bottom Layer w0.254: Z151.1@-19.066,-76.481 -17.935,-77.612 -11.307,-77.612 CSC.D18@-10.176,-76.481
NetCSC_D19: CSC.D19 Z138.1 | length 3.3
  Bottom Layer w0.254: Z138.1@-15.976,-79.021 CSC.D19@-12.716,-79.021
NetCSC_D20: CSC.D20 Z152.1 | length 9.8
  Bottom Layer w0.254: Z152.1@-19.066,-79.021 -17.935,-80.152 -11.307,-80.152 CSC.D20@-10.176,-79.021
NetCSC_D21: CSC.D21 Z139.1 | length 3.3
  Bottom Layer w0.254: Z139.1@-15.976,-81.561 CSC.D21@-12.716,-81.561
NetCSC_D22: CSC.D22 Z153.1 | length 9.8
  Bottom Layer w0.254: Z153.1@-19.066,-81.561 -17.935,-82.692 -11.307,-82.692 CSC.D22@-10.176,-81.561
NetCSC_D23: CSC.D23 Z122.2 | length 3.3
  Bottom Layer w0.254: Z122.2@-15.976,-84.101 CSC.D23@-12.716,-84.101
NetCSC_D24: CSC.D24 Z123.2 | length 9.8
  Bottom Layer w0.254: Z123.2@-19.066,-84.101 -17.935,-85.232 -11.307,-85.232 CSC.D24@-10.176,-84.101
NetCSC_F1: CSC.F1 Z124.2 | length 3.1
  Bottom Layer w0.254: CSC.F1@-112.986,-79.011 -112.828,-78.853 Z124.2@-112.828,-76.021
NetCSC_F2: CSC.F2 Z125.2 | length 2.8
  Bottom Layer w0.254: CSC.F2@-110.428,-78.853 Z125.2@-110.428,-76.021
NetJ8_1: J8.1 Z72.2 | length 2.4
  Bottom Layer w0.508: Z72.2@-161.8,-89.391 J8.1@-161.8,-86.941
NetJ8_2: J8.2 Z73.2 | length 2.5
  Bottom Layer w0.508: J8.2@-161.8,-83.944 Z73.2@-161.8,-81.491
NetJ8_3: J8.3 Z74.2 | length 2.4
  Bottom Layer w0.508: Z74.2@-164.8,-89.391 J8.3@-164.8,-86.941
NetJ8_4: J8.4 Z75.2 | length 2.5
  Bottom Layer w0.508: J8.4@-164.8,-83.944 Z75.2@-164.8,-81.491
NetJ8_5: J8.5 Z76.2 | length 2.4
  Bottom Layer w0.508: Z76.2@-167.8,-89.391 J8.5@-167.8,-86.941
NetJ8_6: J8.6 Z77.2 | length 2.5
  Bottom Layer w0.508: J8.6@-167.8,-83.944 Z77.2@-167.8,-81.491
NetJ8_7: J8.7 Z78.2 | length 2.4
  Bottom Layer w0.508: Z78.2@-170.8,-89.391 J8.7@-170.8,-86.941
NetJ8_8: J8.8 Z79.2 | length 2.5
  Bottom Layer w0.508: J8.8@-170.8,-83.944 Z79.2@-170.8,-81.491
NetJ9_1: J9.1 Z80.2 | length 2.4
  Bottom Layer w0.508: Z80.2@-140.75,-89.391 J9.1@-140.75,-86.941
NetJ9_2: J9.2 Z81.2 | length 2.5
  Bottom Layer w0.508: J9.2@-140.75,-83.944 Z81.2@-140.75,-81.491
NetJ9_3: J9.3 Z82.2 | length 2.4
  Bottom Layer w0.508: Z82.2@-143.75,-89.391 J9.3@-143.75,-86.941
NetJ9_4: J9.4 Z83.2 | length 2.5
  Bottom Layer w0.508: J9.4@-143.75,-83.944 Z83.2@-143.75,-81.491
NetJ9_5: J9.5 Z84.2 | length 2.4
  Bottom Layer w0.508: Z84.2@-146.75,-89.391 J9.5@-146.75,-86.941
NetJ9_6: J9.6 Z85.2 | length 2.5
  Bottom Layer w0.508: J9.6@-146.75,-83.944 Z85.2@-146.75,-81.491
NetJ9_7: J9.7 Z86.2 | length 2.4
  Bottom Layer w0.508: Z86.2@-149.75,-89.391 J9.7@-149.75,-86.941
NetJ9_8: J9.8 Z87.2 | length 2.5
  Bottom Layer w0.508: J9.8@-149.75,-83.944 Z87.2@-149.75,-81.491
NetJ10_1: J10.1 Z88.2 | length 2.4
  Bottom Layer w0.508: Z88.2@-120.25,-89.391 J10.1@-120.25,-86.941
NetJ10_2: J10.2 Z89.2 | length 2.5
  Bottom Layer w0.508: J10.2@-120.25,-83.944 Z89.2@-120.25,-81.491
NetJ10_3: J10.3 Z90.2 | length 2.4
  Bottom Layer w0.508: Z90.2@-123.25,-89.391 J10.3@-123.25,-86.941
NetJ10_4: J10.4 Z91.2 | length 2.5
  Bottom Layer w0.508: J10.4@-123.25,-83.944 Z91.2@-123.25,-81.491
NetJ10_5: J10.5 Z92.2 | length 2.4
  Bottom Layer w0.508: Z92.2@-126.25,-89.391 J10.5@-126.25,-86.941
NetJ10_6: J10.6 Z93.2 | length 2.5
  Bottom Layer w0.508: J10.6@-126.25,-83.944 Z93.2@-126.25,-81.491
NetJ10_7: J10.7 Z94.2 | length 2.4
  Bottom Layer w0.508: Z94.2@-129.25,-89.391 J10.7@-129.25,-86.941
NetJ10_8: J10.8 Z95.2 | length 2.5
  Bottom Layer w0.508: J10.8@-129.25,-83.944 Z95.2@-129.25,-81.491
NetJP1_2: JP1.2 U1.8 | length 5.4
  Top Layer w0.254: U1.8@-55.316,-79.756 -53.121,-79.756 -51.225,-81.652 JP1.2@-50.716,-81.652
NetJP2_2: JP2.2 U1.7 | length 12.8
  Top Layer w0.254: U1.7@-55.316,-81.026 -53.351,-81.026 -52.216,-82.161 -52.216,-84.161 -51.216,-85.161 -50.216,-85.161 -49.216,-84.161 -49.216,-82.661 -48.207,-81.652 JP2.2@-47.716,-81.652
NetQ1_2: Q1.2 R9.1 | length 4.5
  Top Layer w0.254: Q1.2@-59.616,-88.551 -55.556,-88.551 R9.1@-55.216,-88.211
NetQ1_3: Q1.3 U1.6 | length 6.8
  Top Layer w0.254: Q1.3@-57.765,-87.661 -57.765,-83.96 -56.101,-82.296 U1.6@-55.316,-82.296
NetR10_PM1_2: R10_PM1.2 R11_PM1.1 U3_PM1.5 | length 8.7
  Top Layer w0.254: v1@-115.491,-59.224 v1(-115.441,-59.174) U3_PM1.5@-115.441,-58.324 ; R11_PM1.1@-115.391,-53.874 v1(-114.391,-53.874) R10_PM1.2@-113.391,-53.874
  Bottom Layer w0.254: v1(-115.441,-59.174) -115.441,-54.924 v1(-114.391,-53.874)
NetR10_PM2_2: R10_PM2.2 R11_PM2.1 U3_PM2.5 | length 8.7
  Top Layer w0.254: R10_PM2.2@-172.216,-69.611 v1(-171.216,-69.611) R11_PM2.1@-170.216,-69.611 ; U3_PM2.5@-170.166,-65.161 v1(-170.166,-64.311) v1@-170.116,-64.261
  Bottom Layer w0.254: v1(-171.216,-69.611) -171.216,-65.361 v1(-170.166,-64.311)
NetR10_PM3_2: R10_PM3.2 R11_PM3.1 U3_PM3.5 | length 8.7
  Top Layer w0.254: R10_PM3.2@-133.675,-58.179 v1(-132.675,-58.179) R11_PM3.1@-131.675,-58.179 ; U3_PM3.5@-131.625,-53.729 v1(-131.625,-52.879) v1@-131.575,-52.829
  Bottom Layer w0.254: v1(-132.675,-58.179) -132.675,-53.929 v1(-131.625,-52.879)
NetR10_PM4_2: R10_PM4.2 R11_PM4.1 U3_PM4.5 | length 8.7
  Top Layer w0.254: R10_PM4.2@-133.616,-69.561 v1(-132.616,-69.561) R11_PM4.1@-131.616,-69.561 ; U3_PM4.5@-131.566,-65.111 v1(-131.566,-64.261) v1@-131.516,-64.211
  Bottom Layer w0.254: v1(-132.616,-69.561) -132.616,-65.311 v1(-131.566,-64.261)
NetR10_PM5_2: R10_PM5.2 R11_PM5.1 U3_PM5.5 | length 8.7
  Top Layer w0.254: R10_PM5.2@-133.675,-46.879 v1(-132.675,-46.879) R11_PM5.1@-131.675,-46.879 ; U3_PM5.5@-131.625,-42.429 v1(-131.625,-41.579) v1@-131.575,-41.529
  Bottom Layer w0.254: v1(-132.675,-46.879) -132.675,-42.629 v1(-131.625,-41.579)
NetR10_PM6_2: R10_PM6.2 R11_PM6.1 U3_PM6.5 | length 8.6
  Top Layer w0.254: R10_PM6.2@-184.975,-69.594 v1(-183.975,-69.594) R11_PM6.1@-182.975,-69.594 ; U3_PM6.5@-182.925,-65.144 v1(-182.925,-64.294) v1@-182.875,-64.244
  Bottom Layer w0.254: v1@-183.875,-69.594 -183.875,-65.244 v1(-182.925,-64.294)
NetR10_PM7_2: R10_PM7.2 R11_PM7.1 U3_PM7.5 | length 8.7
  Top Layer w0.254: R10_PM7.2@-184.975,-58.164 v1(-183.975,-58.164) R11_PM7.1@-182.975,-58.164 ; U3_PM7.5@-182.925,-53.714 v1(-182.925,-52.864) v1@-182.875,-52.814
  Bottom Layer w0.254: v1(-183.975,-58.164) -183.975,-53.914 v1(-182.925,-52.864)
NetR10_PM8_2: R10_PM8.2 R11_PM8.1 U3_PM8.5 | length 8.7
  Top Layer w0.254: R10_PM8.2@-185.016,-46.911 v1(-184.016,-46.911) R11_PM8.1@-183.016,-46.911 ; U3_PM8.5@-182.966,-42.461 v1(-182.966,-41.611) v1@-182.916,-41.561
  Bottom Layer w0.254: v1(-184.016,-46.911) -184.016,-42.661 v1(-182.966,-41.611)
NetR10_PM9_2: R10_PM9.2 R11_PM9.1 U3_PM9.5 | length 8.7
  Top Layer w0.254: R10_PM9.2@-172.216,-46.911 v1(-171.216,-46.911) R11_PM9.1@-170.216,-46.911 ; U3_PM9.5@-170.166,-42.461 v1(-170.166,-41.611) v1@-170.116,-41.561
  Bottom Layer w0.254: v1(-171.216,-46.911) -171.216,-42.661 v1(-170.166,-41.611)
NetR10_PM10_2: R10_PM10.2 R11_PM10.1 U3_PM10.5 | length 8.7
  Top Layer w0.254: R10_PM10.2@-146.616,-58.211 v1(-145.616,-58.211) R11_PM10.1@-144.616,-58.211 ; U3_PM10.5@-144.566,-53.761 v1(-144.566,-52.911) v1@-144.516,-52.861
  Bottom Layer w0.254: v1(-145.616,-58.211) -145.4,-57.995 -145.4,-53.745 v1(-144.566,-52.911)
NetR10_PM11_2: R10_PM11.2 R11_PM11.1 U3_PM11.5 | length 8.7
  Top Layer w0.254: R10_PM11.2@-146.575,-69.579 v1(-145.575,-69.579) R11_PM11.1@-144.575,-69.579 ; U3_PM11.5@-144.525,-65.129 v1(-144.525,-64.279) v1@-144.475,-64.229
  Bottom Layer w0.254: v1(-145.575,-69.579) -145.4,-69.404 -145.4,-65.154 v1(-144.525,-64.279)
NetR10_PM12_2: R10_PM12.2 R11_PM12.1 U3_PM12.5 | length 8.7
  Top Layer w0.254: R10_PM12.2@-159.475,-69.679 v1(-158.475,-69.679) R11_PM12.1@-157.475,-69.679 ; U3_PM12.5@-157.425,-65.229 v1(-157.425,-64.379) v1@-157.375,-64.329
  Bottom Layer w0.254: v1(-158.475,-69.679) -158.475,-65.429 v1(-157.425,-64.379)
NetR10_PM13_2: R10_PM13.2 R11_PM13.1 U3_PM13.5 | length 8.7
  Top Layer w0.254: R10_PM13.2@-146.575,-46.879 v1(-145.575,-46.879) R11_PM13.1@-144.575,-46.879 ; U3_PM13.5@-144.525,-42.429 v1(-144.525,-41.579) v1@-144.475,-41.529
  Bottom Layer w0.254: v1(-145.575,-46.879) -145.4,-46.704 -145.4,-42.454 v1(-144.525,-41.579)
NetR10_PM14_2: R10_PM14.2 R11_PM14.1 U3_PM14.5 | length 8.7
  Top Layer w0.254: R10_PM14.2@-159.375,-46.879 v1(-158.375,-46.879) R11_PM14.1@-157.375,-46.879 ; U3_PM14.5@-157.325,-42.429 v1(-157.325,-41.579) v1@-157.275,-41.529
  Bottom Layer w0.254: v1(-158.375,-46.879) -158.375,-42.629 v1(-157.325,-41.579)
NetR10_PM15_2: R10_PM15.2 R11_PM15.1 U3_PM15.5 | length 8.7
  Top Layer w0.254: R10_PM15.2@-159.475,-58.279 v1(-158.475,-58.279) R11_PM15.1@-157.475,-58.279 ; U3_PM15.5@-157.425,-53.829 v1(-157.425,-52.979) v1@-157.375,-52.929
  Bottom Layer w0.254: v1(-158.475,-58.279) -158.475,-54.029 v1(-157.425,-52.979)
NetR10_PM16_2: R10_PM16.2 R11_PM16.1 U3_PM16.5 | length 8.7
  Top Layer w0.254: R10_PM16.2@-172.175,-58.279 v1(-171.175,-58.279) R11_PM16.1@-170.175,-58.279 ; U3_PM16.5@-170.125,-53.829 v1(-170.125,-52.979) v1@-170.075,-52.929
  Bottom Layer w0.254: v1(-171.175,-58.279) -171.175,-54.029 v1(-170.125,-52.979)
NetR12_PM1_1: R12_PM1.1 U3_PM1.10 | length 2.5
  Top Layer w0.3: R12_PM1.1@-111.391,-53.874 -111.341,-53.924 U3_PM1.10@-111.341,-56.324
NetR12_PM2_1: R12_PM2.1 U3_PM2.10 | length 2.4
  Top Layer w0.3: R12_PM2.1@-174.216,-69.611 U3_PM2.10@-174.216,-67.211
NetR12_PM3_1: R12_PM3.1 U3_PM3.10 | length 2.4
  Top Layer w0.3: R12_PM3.1@-135.675,-58.179 U3_PM3.10@-135.675,-55.779
NetR12_PM4_1: R12_PM4.1 U3_PM4.10 | length 2.5
  Top Layer w0.3: U3_PM4.10@-135.666,-67.111 -135.666,-69.511 R12_PM4.1@-135.616,-69.561
NetR12_PM5_1: R12_PM5.1 U3_PM5.10 | length 2.4
  Top Layer w0.3: R12_PM5.1@-135.725,-46.829 U3_PM5.10@-135.725,-44.429
NetR12_PM6_1: R12_PM6.1 U3_PM6.10 | length 2.4
  Top Layer w0.3: R12_PM6.1@-187.025,-69.544 U3_PM6.10@-187.025,-67.144
NetR12_PM7_1: R12_PM7.1 U3_PM7.10 | length 2.4
  Top Layer w0.3: R12_PM7.1@-186.975,-58.164 U3_PM7.10@-186.975,-55.764
NetR12_PM8_1: R12_PM8.1 U3_PM8.10 | length 2.4
  Top Layer w0.3: R12_PM8.1@-187.016,-46.911 U3_PM8.10@-187.016,-44.511
NetR12_PM9_1: R12_PM9.1 U3_PM9.10 | length 2.4
  Top Layer w0.3: R12_PM9.1@-174.266,-46.861 U3_PM9.10@-174.266,-44.461
NetR12_PM10_1: R12_PM10.1 U3_PM10.10 | length 2.4
  Top Layer w0.3: R12_PM10.1@-148.666,-58.161 U3_PM10.10@-148.666,-55.761
NetR12_PM11_1: R12_PM11.1 U3_PM11.10 | length 2.4
  Top Layer w0.3: R12_PM11.1@-148.625,-69.529 U3_PM11.10@-148.625,-67.129
NetR12_PM12_1: R12_PM12.1 U3_PM12.10 | length 2.4
  Top Layer w0.3: R12_PM12.1@-161.525,-69.629 U3_PM12.10@-161.525,-67.229
NetR12_PM13_1: R12_PM13.1 U3_PM13.10 | length 2.4
  Top Layer w0.3: R12_PM13.1@-148.625,-46.829 U3_PM13.10@-148.625,-44.429
NetR12_PM14_1: R12_PM14.1 U3_PM14.10 | length 2.4
  Top Layer w0.3: R12_PM14.1@-161.425,-46.829 U3_PM14.10@-161.425,-44.429
NetR12_PM15_1: R12_PM15.1 U3_PM15.10 | length 2.4
  Top Layer w0.3: R12_PM15.1@-161.525,-58.229 U3_PM15.10@-161.525,-55.829
NetR12_PM16_1: R12_PM16.1 U3_PM16.10 | length 2.4
  Top Layer w0.3: R12_PM16.1@-174.225,-58.229 U3_PM16.10@-174.225,-55.829
NetR14_PM1_2: R14_PM1.2 R15_PM1.1 U3_PM1.8 | length 11.9
  Top Layer w0.3: R15_PM1.1@-114.491,-62.024 R14_PM1.2@-112.791,-62.024 -112.791,-61.946 -111.969,-61.124 -110.391,-61.124 -109.939,-60.672 -109.939,-59.776 -110.691,-59.024 -112.291,-59.024 -112.891,-58.424 -112.891,-57.924 -112.291,-57.324 U3_PM1.8@-111.341,-57.324
NetR14_PM2_2: R14_PM2.2 R15_PM2.1 U3_PM2.8 | length 11.9
  Top Layer w0.3: U3_PM2.8@-174.266,-66.161 -173.316,-66.161 -172.716,-65.561 -172.716,-65.061 -173.316,-64.461 -174.916,-64.461 -175.669,-63.709 -175.669,-62.813 -175.216,-62.361 -173.639,-62.361 -172.816,-61.539 R14_PM2.2@-172.816,-61.461 R15_PM2.1@-171.116,-61.461
NetR14_PM3_2: R14_PM3.2 R15_PM3.1 U3_PM3.8 | length 12.3
  Top Layer w0.3: -136.891,-51.136 -136.891,-52.113 -136.375,-52.629 -134.175,-52.629 -133.775,-53.029 -133.775,-53.729 -134.775,-54.729 U3_PM3.8@-135.725,-54.729 ; -136.866,-51.111 -136.716,-50.961 ; -136.675,-50.929 -135.098,-50.929 -134.275,-50.107 R14_PM3.2@-134.275,-50.029 R15_PM3.1@-132.575,-50.029
NetR14_PM4_2: R14_PM4.2 R15_PM4.1 U3_PM4.8 | length 11.8
  Top Layer w0.3: -136.616,-62.361 -137.069,-62.813 -137.069,-63.709 -136.366,-64.411 -134.716,-64.411 -134.116,-65.011 -134.116,-65.511 -134.716,-66.111 U3_PM4.8@-135.666,-66.111 ; -136.616,-62.311 -135.039,-62.311 -134.216,-61.489 R14_PM4.2@-134.216,-61.411 R15_PM4.1@-132.516,-61.411
NetR14_PM5_2: R14_PM5.2 R15_PM5.1 U3_PM5.8 | length 12.3
  Top Layer w0.3: -136.891,-39.836 -136.891,-40.813 -136.375,-41.329 -134.175,-41.329 -133.775,-41.729 -133.775,-42.429 -134.775,-43.429 U3_PM5.8@-135.725,-43.429 ; -136.866,-39.811 -136.716,-39.661 ; -136.675,-39.629 -135.098,-39.629 -134.275,-38.807 R14_PM5.2@-134.275,-38.729 R15_PM5.1@-132.575,-38.729
NetR14_PM6_2: R14_PM6.2 R15_PM6.1 U3_PM6.8 | length 11.9
  Top Layer w0.3: U3_PM6.8@-187.025,-66.144 -186.075,-66.144 -185.475,-65.544 -185.475,-65.044 -186.075,-64.444 -187.675,-64.444 -188.428,-63.692 -188.428,-62.796 -187.975,-62.344 -186.398,-62.344 -185.575,-61.522 R14_PM6.2@-185.575,-61.444 R15_PM6.1@-183.875,-61.444
NetR14_PM7_2: R14_PM7.2 R15_PM7.1 U3_PM7.8 | length 11.9
  Top Layer w0.3: U3_PM7.8@-187.025,-54.714 -186.075,-54.714 -185.475,-54.114 -185.475,-53.614 -186.075,-53.014 -187.675,-53.014 -188.428,-52.262 -188.428,-51.366 -187.975,-50.914 -186.398,-50.914 -185.575,-50.092 R14_PM7.2@-185.575,-50.014 R15_PM7.1@-183.875,-50.014
NetR14_PM8_2: R14_PM8.2 R15_PM8.1 U3_PM8.8 | length 11.9
  Top Layer w0.3: U3_PM8.8@-187.066,-43.461 -186.116,-43.461 -185.516,-42.861 -185.516,-42.361 -186.116,-41.761 -187.716,-41.761 -188.469,-41.009 -188.469,-40.113 -188.016,-39.661 -186.439,-39.661 -185.616,-38.839 R14_PM8.2@-185.616,-38.761 R15_PM8.1@-183.916,-38.761
NetR14_PM9_2: R14_PM9.2 R15_PM9.1 U3_PM9.8 | length 12.3
  Top Layer w0.3: -175.432,-39.868 -175.432,-40.845 -174.916,-41.361 -172.716,-41.361 -172.316,-41.761 -172.316,-42.461 -173.316,-43.461 U3_PM9.8@-174.266,-43.461 ; -175.366,-39.811 -175.216,-39.661 -173.639,-39.661 -172.816,-38.839 R14_PM9.2@-172.816,-38.761 R15_PM9.1@-171.116,-38.761
NetR14_PM10_2: R14_PM10.2 R15_PM10.1 U3_PM10.8 | length 12.3
  Top Layer w0.3: -149.832,-51.168 -149.832,-52.145 -149.316,-52.661 -147.116,-52.661 -146.716,-53.061 -146.716,-53.761 -147.716,-54.761 U3_PM10.8@-148.666,-54.761 ; -149.791,-51.136 -149.616,-50.961 -148.039,-50.961 -147.216,-50.139 R14_PM10.2@-147.216,-50.061 R15_PM10.1@-145.516,-50.061
NetR14_PM11_2: R14_PM11.2 R15_PM11.1 U3_PM11.8 | length 12.3
  Top Layer w0.3: -149.616,-62.361 -149.791,-62.536 -149.791,-63.513 -149.275,-64.029 -147.075,-64.029 -146.675,-64.429 -146.675,-65.129 -147.675,-66.129 U3_PM11.8@-148.625,-66.129 ; -149.575,-62.329 -147.998,-62.329 -147.175,-61.507 R14_PM11.2@-147.175,-61.429 R15_PM11.1@-145.475,-61.429
NetR14_PM12_2: R14_PM12.2 R15_PM12.1 U3_PM12.8 | length 12.3
  Top Layer w0.3: -162.516,-62.461 -162.691,-62.636 -162.691,-63.613 -162.175,-64.129 -159.975,-64.129 -159.575,-64.529 -159.575,-65.229 -160.575,-66.229 U3_PM12.8@-161.525,-66.229 ; -162.475,-62.429 -160.898,-62.429 -160.075,-61.607 R14_PM12.2@-160.075,-61.529 R15_PM12.1@-158.375,-61.529
NetR14_PM13_2: R14_PM13.2 R15_PM13.1 U3_PM13.8 | length 12.3
  Top Layer w0.3: -149.791,-39.836 -149.791,-40.813 -149.275,-41.329 -147.075,-41.329 -146.675,-41.729 -146.675,-42.429 -147.675,-43.429 U3_PM13.8@-148.625,-43.429 ; -149.766,-39.811 -149.616,-39.661 ; -149.575,-39.629 -147.998,-39.629 -147.175,-38.807 R14_PM13.2@-147.175,-38.729 R15_PM13.1@-145.475,-38.729
NetR14_PM14_2: R14_PM14.2 R15_PM14.1 U3_PM14.8 | length 11.9
  Top Layer w0.3: -162.416,-39.661 -162.869,-40.113 -162.869,-41.009 -162.116,-41.761 ; -162.375,-39.629 -160.798,-39.629 -159.975,-38.807 R14_PM14.2@-159.975,-38.729 R15_PM14.1@-158.275,-38.729 ; -162.075,-41.729 -160.475,-41.729 -159.875,-42.329 -159.875,-42.829 -160.475,-43.429 U3_PM14.8@-161.425,-43.429
NetR14_PM15_2: R14_PM15.2 R15_PM15.1 U3_PM15.8 | length 11.9
  Top Layer w0.3: -162.516,-51.061 -162.969,-51.513 -162.969,-52.409 -162.216,-53.161 ; -162.475,-51.029 -160.898,-51.029 -160.075,-50.207 R14_PM15.2@-160.075,-50.129 R15_PM15.1@-158.375,-50.129 ; -162.175,-53.129 -160.575,-53.129 -159.975,-53.729 -159.975,-54.229 -160.575,-54.829 U3_PM15.8@-161.525,-54.829
NetR14_PM16_2: R14_PM16.2 R15_PM16.1 U3_PM16.8 | length 11.9
  Top Layer w0.3: -175.216,-51.061 -175.669,-51.513 -175.669,-52.409 -174.916,-53.161 ; -175.175,-51.029 -173.598,-51.029 -172.775,-50.207 R14_PM16.2@-172.775,-50.129 R15_PM16.1@-171.075,-50.129 ; -174.875,-53.129 -173.275,-53.129 -172.675,-53.729 -172.675,-54.229 -173.275,-54.829 U3_PM16.8@-174.225,-54.829
NetR16_PM1_2: R16_PM1.2 R17_PM1.1 U3_PM1.9 | length 6.7
  Top Layer w0.3: R17_PM1.1@-114.491,-60.224 -113.641,-60.224 ; R16_PM1.2@-112.791,-60.224 -113.641,-60.224 ; U3_PM1.9@-111.341,-56.824 -112.491,-56.824 -113.641,-57.974 -113.641,-60.224
NetR16_PM2_2: R16_PM2.2 R17_PM2.1 U3_PM2.9 | length 6.7
  Top Layer w0.3: U3_PM2.9@-174.266,-66.661 -173.116,-66.661 -171.966,-65.511 -171.966,-63.261 ; R16_PM2.2@-172.816,-63.261 -171.966,-63.261 ; R17_PM2.1@-171.116,-63.261 -171.966,-63.261
NetR16_PM3_2: R16_PM3.2 R17_PM3.1 U3_PM3.9 | length 6.8
  Top Layer w0.3: U3_PM3.9@-135.725,-55.229 -134.575,-55.229 -133.316,-53.97 -133.316,-51.829 ; R16_PM3.2@-134.275,-51.829 -133.425,-51.829 R17_PM3.1@-132.575,-51.829